# EAGLE board chunkycopter-v2 (EAGLE 9.6.2)
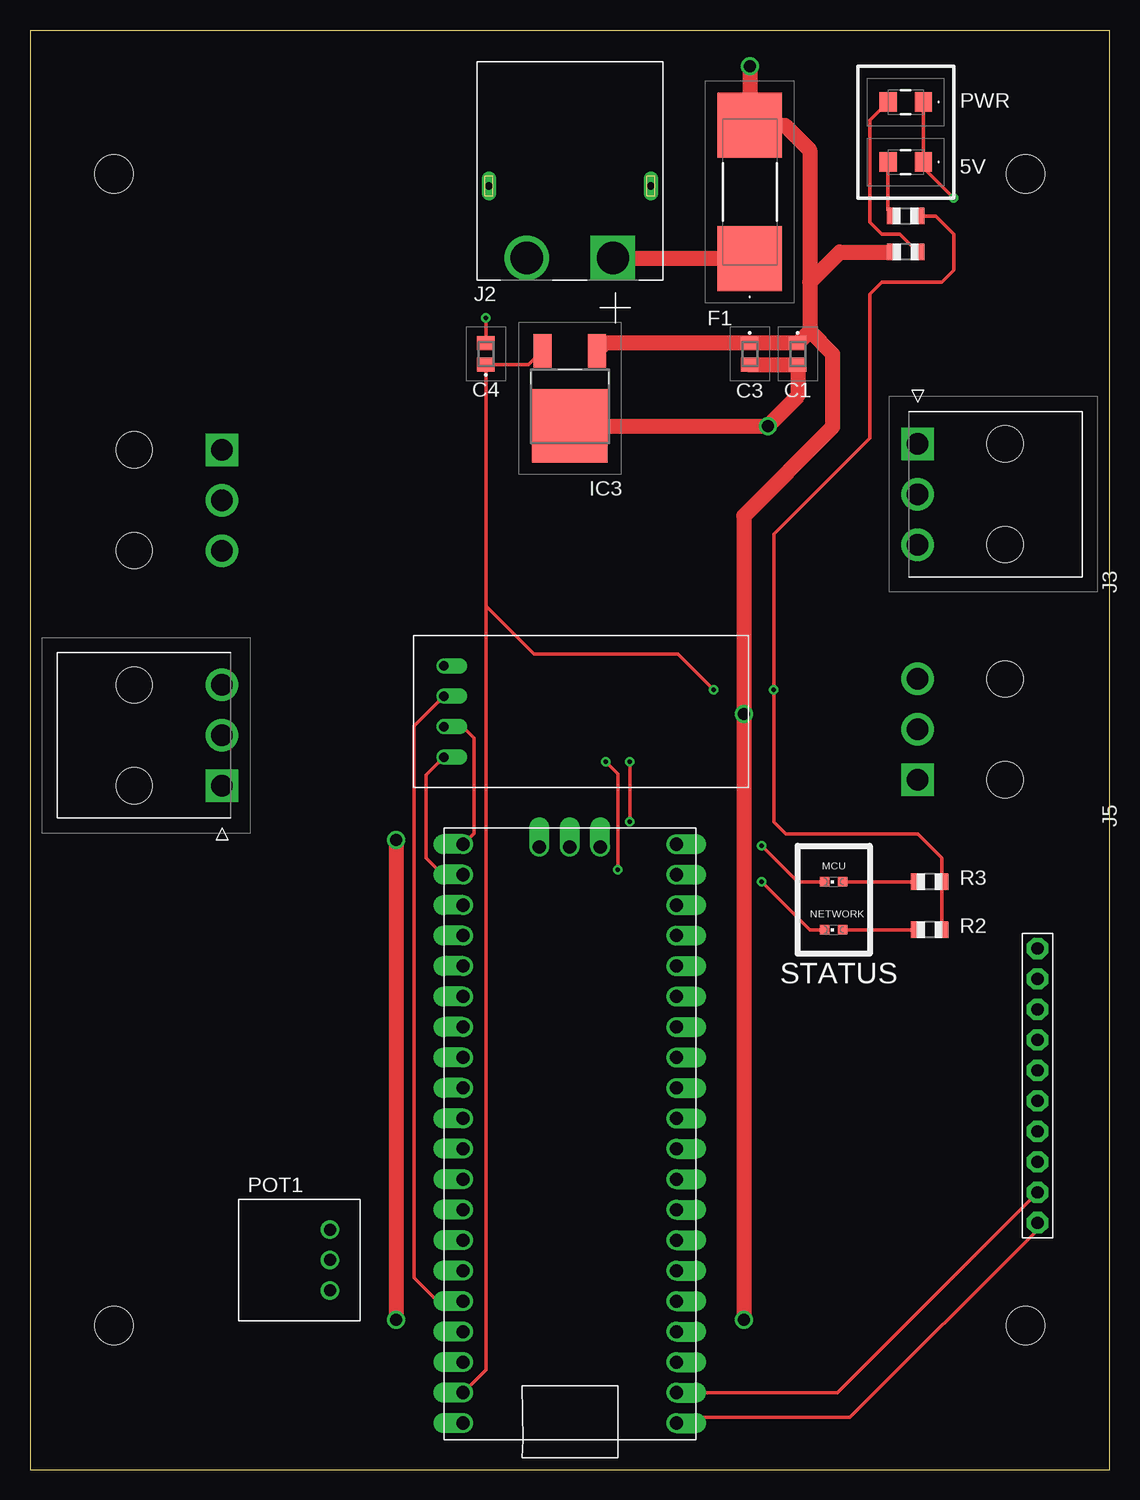
[diagram p0: board, top side]
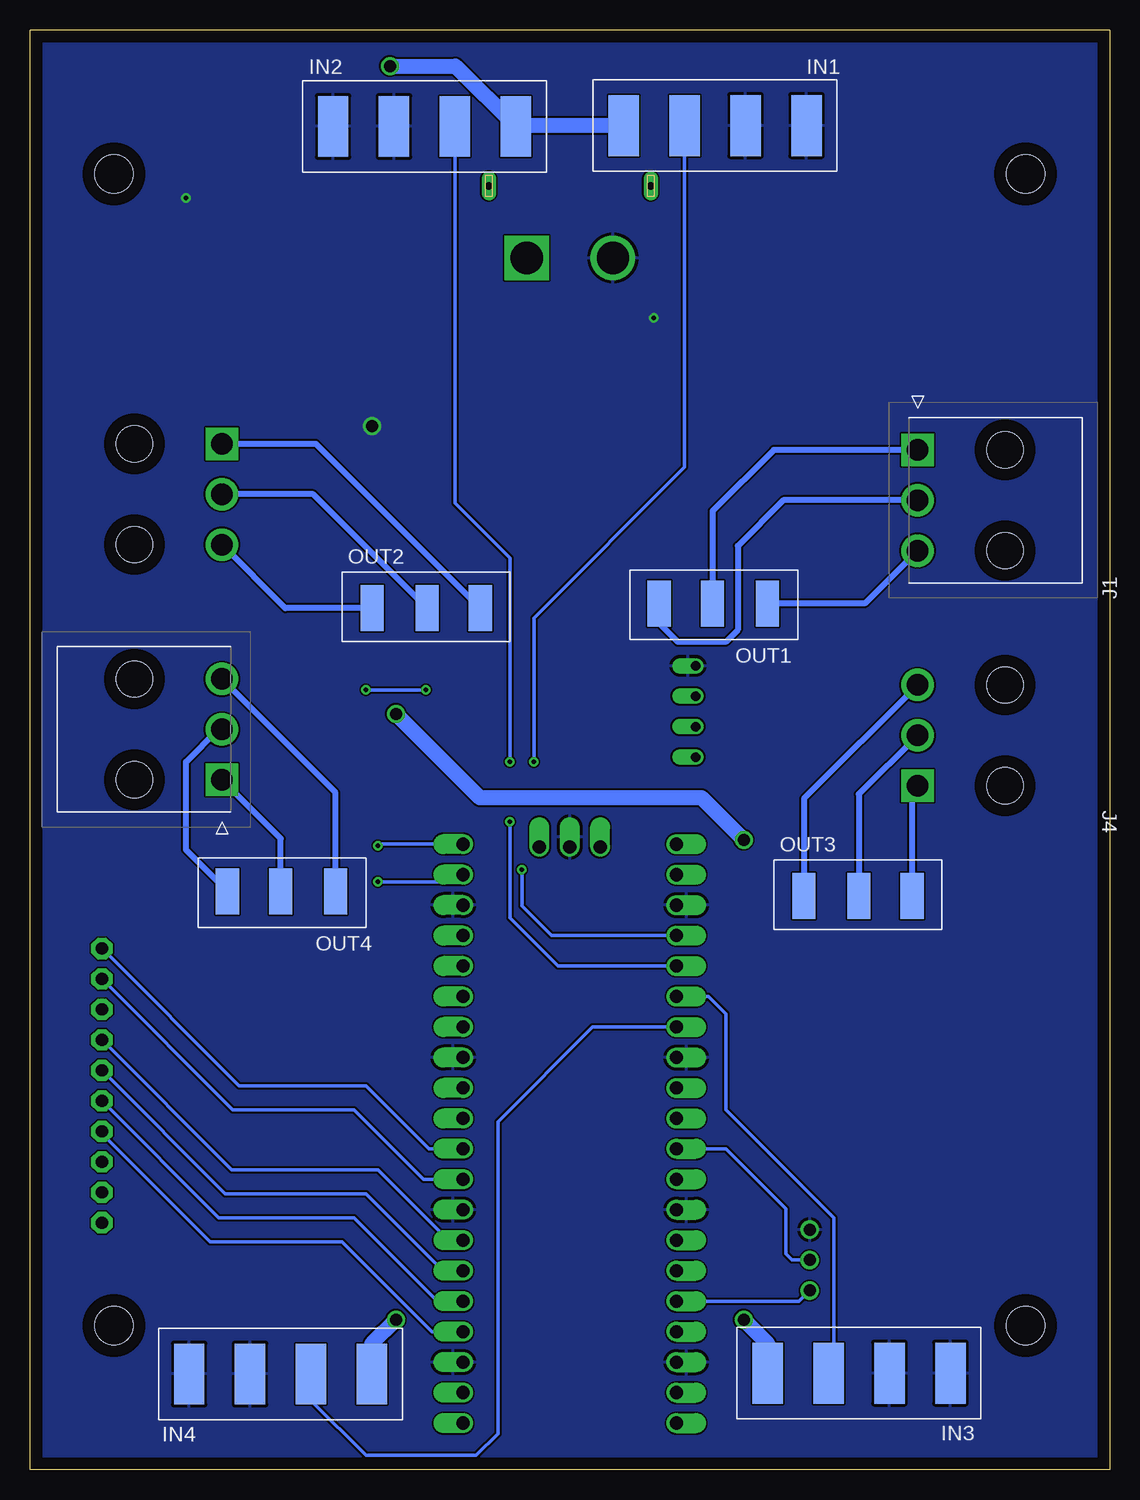
[diagram p1: board, bottom side, seen from below]

Size 90 x 120 mm. Coordinates in mm from the lower left corner, seen from the top.
Outline: 0,0 90,0 90,120 0,120 0,0
Copper layers (1*16): Top 0.035mm / dielectric 1.5mm / Bottom 0.035mm
Design rules "default": minimum track width 6mil, minimum drill 0.35mm, track to track 6mil, track to pad 6mil, pad to pad 6mil, via to via 6mil, smd to smd 6mil, copper to edge 40mil, drill to drill 6mil, minimum pad ring 10mil, minimum via ring 8mil, stop-mask expansion 4mil, vias tented up to drill 0mil, thermal gap 10mil
Holes 3.2 mm at 7,12 7,108 83,108 83,12

## Footprints (pad centres in the part's own frame; a part is rotated, then mirrored left to right if it is on the bottom)
C0805 = smd 1.15 x 1.45: 1 -0.9,0; 2 0.9,0
0456060DRSDE = smd 5.4 x 5.4: 1 -5.56,0; 2 5.56,0
L7805CDTTR = smd 1.5 x 2.8: 1 -2.286,-6.25; 3 2.286,-6.25 | smd 6.3 x 6.1: 2 0,0
ESC-INPUT = smd 5.08 x 2.54: A+ 2.54,11.43; A- 2.54,6.35; GND 2.54,1.27; VCC 2.54,16.51
39303037 = drill 1.8 pad 2.3 square: 1 0,0 | drill 1.8 pad 2.3: 2 -4.2,0; 3 -8.4,0 | hole 3: 0,-7.3; -8.4,-7.3
AMASS_XT60PW-M = drill 2.7 square: 1 3.6,-6 | drill 2.7: 2 -3.6,-6 | drill 0.6 pad 1.2 long: S1 6.75,0; S2 -6.75,0
SML012ENTT86 = smd 1.45 x 1.6: 1 -1.475,0; 2 1.475,0
CHIPLED_0603 = smd 0.8 x 0.8: A 0,-0.75; C 0,0.75
ESC-OUT = smd 1.93 x 3.81: 1 1.524,3.81; 2 6.096,3.81; 3 10.541,3.81
POT = drill 1: P_GND 0,0; P_VCC 0,5.08; P_VOUT 0,2.54
R0805 = smd 1.1 x 1.4: 1 -1,0; 2 1,0
RPI_PICO_TH = drill 1.1 pad 1.6 offset: 3V3 8.89,13.97; 3V3_EN 8.89,16.51; ADC_VREF 8.89,11.43; AGND 8.89,6.35; GND@1 -8.89,19.05; GND@2 -8.89,6.35; GND@3 -8.89,-6.35; GND@4 -8.89,-19.05; GND@5 0,-23.9; GND@6 8.89,-19.05; GND@7 8.89,-6.35; GND@8 8.89,19.05; GP0 -8.89,24.13; GP1 -8.89,21.59; GP2 -8.89,16.51; GP3 -8.89,13.97; GP4 -8.89,11.43; GP5 -8.89,8.89; GP6 -8.89,3.81; GP7 -8.89,1.27; GP8 -8.89,-1.27; GP9 -8.89,-3.81; GP10 -8.89,-8.89; GP11 -8.89,-11.43; GP12 -8.89,-13.97; GP13 -8.89,-16.51; GP14 -8.89,-21.59; GP15 -8.89,-24.13; GP16 8.89,-24.13; GP17 8.89,-21.59; GP18 8.89,-16.51; GP19 8.89,-13.97; GP20 8.89,-11.43; GP21 8.89,-8.89; GP22 8.89,-3.81; GP26_A0 8.89,1.27; GP27_A1 8.89,3.81; GP28_A2 8.89,8.89; RUN 8.89,-1.27; SWCLK -2.54,-23.9; SWDIO 2.54,-23.9; VBUS 8.89,24.13; VSYS 8.89,21.59
LSM9DS1_IMU = drill 0.8 offset: P$1 0,0; P$2 0,-2.54; P$3 0,-5.08; P$4 0,-7.62
1X10-BIG = drill 1.016 pad 1.778 octagon: 1 -11.43,0; 2 -8.89,0; 3 -6.35,0; 4 -3.81,0; 5 -1.27,0; 6 1.27,0; 7 3.81,0; 8 6.35,0; 9 8.89,0; 10 11.43,0

## Placement (x,y rotation side)
C1  0.1uF  [C0805]  64,93 270 top
C3  .33uF  [C0805]  60,93 270 top
C4  0.1uF  [C0805]  38,93 90 top
F1  250V 60A  [0456060DRSDE]  60,106.5 90 top
IC3  L7805CDT-TR  [L7805CDTTR]  45,87 180 top
IN1  ESC_IN  [ESC-INPUT]  24,109.5 90 bottom
IN2  ESC_IN  [ESC-INPUT]  66,114.5 270 bottom
IN3  ESC_IN  [ESC-INPUT]  12,5.5 90 bottom
IN4  ESC_IN  [ESC-INPUT]  78,10.5 270 bottom
J1  MOLEX-CONN-39-30-3037  [39303037]  16,85 90 bottom
J2  XT60PW-M  [AMASS_XT60PW-M]  45,107 0 top
J3  MOLEX-CONN-39-30-3037  [39303037]  74,85.5 90 top
J4  MOLEX-CONN-39-30-3037  [39303037]  16,57 270 top
J5  MOLEX-CONN-39-30-3037  [39303037]  74,57.5 270 bottom
LED1  GREEN  [SML012ENTT86]  73,114 180 top
LED2  GREEN  [CHIPLED_0603]  67,45 90 top
LED3  GREEN  [CHIPLED_0603]  67,49 90 top
LED4  GREEN  [SML012ENTT86]  73,109 180 top
OUT1  ESC-BLDC-CONNSMD  [ESC-OUT]  27,76 180 bottom
OUT2  ESC-BLDC-CONNSMD  [ESC-OUT]  63,68 0 bottom
OUT3  ESC-BLDC-CONNSMD  [ESC-OUT]  27,44 0 bottom
OUT4  ESC-BLDC-CONNSMD  [ESC-OUT]  63,52 180 bottom
POT1  POT-CONN  [POT]  25,20 180 top
R1  1k  [R0805]  73,101.5 180 top
R2  150  [R0805]  75,45 180 top
R3  150  [R0805]  75,49 180 top
R4  150  [R0805]  73,104.5 0 top
U$1  [RPI_PICO_TH]  45,28 180 top
U$2  LSM9DS1_IMU  [LSM9DS1_IMU]  34.5,67 0 top
U$3  [1X10-BIG]  84,32 270 top

## Library data of the parts
C1 C4 = C0805C104K5RACTU; DESCRIPTION: SMD Comm X7R, Ceramic, 0.1 uF, 10%, 50 VDC, 125 VDC, 125C, -55C, X7R, SMD, MLCC, Temperature Stable, Class II, 2.5 % , 5 GOhms, 11 mg, 0805, 2mm, 1.25mm, 0.78mm, 0.75mm, 0.5mm, 4000, 78 Weeks, 80; HEIGHT: 1.1mm; MANUFACTURER_NAME: KEMET; MANUFACTURER_PART_NUMBER: C0805C104K5RACTU; MOUSER_PART_NUMBER: 80-C0805C104K5R; MOUSER_PRICE-STOCK: https://www.mouser.co.uk/ProductDetail/KEMET/C0805C104K5RACTU?qs=Pc30aiB8zWUISNb2Qeyxfw%3D%3D
C3 = C0805C334K5RACTU; DESCRIPTION: SMD Comm X7R, Ceramic, 0.33 uF, 10%, 50 VDC, 125 VDC, 125C, -55C, X7R, SMD, MLCC, Temperature Stable, Class II, 2.5 % , 1.5152 GOhms, 13 mg, 0805, 2mm, 1.25mm, 0.9mm, 0.75mm, 0.5mm, 4000, 78 Weeks, 80; HEIGHT: 1.1mm; MANUFACTURER_NAME: KEMET; MANUFACTURER_PART_NUMBER: C0805C334K5RACTU; MOUSER_PART_NUMBER: 80-C0805C334K5R; MOUSER_PRICE-STOCK: https://www.mouser.co.uk/ProductDetail/KEMET/C0805C334K5RACTU?qs=nRD1PKnFC2Hh3tSy%2FGeH2Q%3D%3D
F1 = 0456060.DRSDE; DESCRIPTION: Surface Mount Fuses 60 AMP HIGH CURRENT SMD FUSE; HEIGHT: 4.5mm; MANUFACTURER_NAME: LITTELFUSE; MANUFACTURER_PART_NUMBER: 0456060.DRSDE; MOUSER_PART_NUMBER: 576-0456060.DRSDE; MOUSER_PRICE-STOCK: https://www.mouser.co.uk/ProductDetail/Littelfuse/0456060.DRSDE?qs=pUKx8fyJudDvlSmwSkC8QA%3D%3D
IC3 = L7805CDT-TR; DESCRIPTION: Linear Voltage Regulators 5.0V 1.0A Positive; HEIGHT: 2.63mm; MANUFACTURER_NAME: STMicroelectronics; MANUFACTURER_PART_NUMBER: L7805CDT-TR; MOUSER_PART_NUMBER: 511-L7805CDT-TR; MOUSER_PRICE-STOCK: https://www.mouser.co.uk/ProductDetail/STMicroelectronics/L7805CDT-TR?qs=gq%2F78KzUDX67VndS%2FbSB4Q%3D%3D
IN1-IN4 = ESC_IN
J1 J3-J5 = 39-30-3037; DESCRIPTION: Headers & Wire Housings 3 CKT R/A HEADER; HEIGHT: 7.2mm; MANUFACTURER_NAME: Molex; MANUFACTURER_PART_NUMBER: 39-30-3037; MOUSER_PART_NUMBER: 538-39-30-3037; MOUSER_PRICE-STOCK: https://www.mouser.co.uk/ProductDetail/Molex/39-30-3037?qs=404muyNbhLHF2IIVL5BKbQ%3D%3D
J2 = XT60PW-M; AVAILABILITY: Not in stock; DESCRIPTION: Socket, DC supply, male, PIN: 2; MF: AMASS; MP: XT60PW-M; PACKAGE: Package; PRICE: None
LED1 LED4 = SML012ENTT86; DESCRIPTION: Standard LEDs - SMD CHIP LED WITH REFLECTOR; HEIGHT: 1.5mm; MANUFACTURER_NAME: ROHM Semiconductor; MANUFACTURER_PART_NUMBER: SML012ENTT86; MOUSER_PART_NUMBER: 755-SML012ENTT86; MOUSER_PRICE-STOCK: https://www.mouser.co.uk/ProductDetail/ROHM-Semiconductor/SML012ENTT86?qs=tlsG%2FOw5FFictRsqziaydg%3D%3D
LED2 LED3 = led
OUT1-OUT4 = esc_bldc_connector
POT1 = POT_CONN
R1-R4 U$3 = adafruit
U$1 = RaspberryPi_Pico
U$2 = LSM9DS1_IMU

## Nets
3.3V: POT1.P_VCC U$1.3V3 U$2.P$2
5V: C4.1 IC3.3 R2.1 R3.1 R4.2 U$1.VSYS
GND: C1.2 C3.2 C4.2 IC3.2 IN1.A- IN1.GND IN2.A- IN2.GND IN3.A- IN3.GND IN4.A- IN4.GND J2.2 LED1.1 LED4.1 POT1.P_GND U$1.AGND U$1.GND@1 U$1.GND@2 U$1.GND@3 U$1.GND@4 U$1.GND@5 U$1.GND@6 U$1.GND@7 U$1.GND@8 U$2.P$1
IMU_SCL_17: U$1.GP17 U$2.P$4
IMU_SDA_16: U$1.GP16 U$2.P$3
MCU_INIT_OK: LED3.C U$1.GP15
MOT1: IN1.A+ U$1.GP18
MOT2: IN2.A+ U$1.GP19
MOT3: IN3.A+ U$1.GP20
MOT4: IN4.A+ U$1.GP21
N$1: LED1.2 R1.1
N$2: J1.3 OUT1.1
N$3: J1.2 OUT1.3
N$4: J1.1 OUT1.2
N$5: J3.3 OUT2.1
N$6: J3.2 OUT2.2
N$7: J3.1 OUT2.3
N$8: J4.3 OUT3.1
N$9: J5.3 OUT4.1
N$10: J4.1 OUT3.3
N$11: J5.1 OUT4.2
N$12: J5.2 OUT4.3
N$13: U$1.GP0 U$3.10
N$14: U$1.GP1 U$3.9
N$15: J4.2 OUT3.2
N$16: U$1.GP2 U$3.7
N$17: U$1.GP3 U$3.6
N$18: U$1.GP4 U$3.5
N$19: U$1.GP5 U$3.4
N$20: U$1.GP6 U$3.2
N$21: U$1.GP7 U$3.1
N$22: LED2.A R2.2
N$23: LED3.A R3.2
N$24: LED4.2 R4.1
NETWORK_OK: LED2.C U$1.GP14
POT: POT1.P_VOUT U$1.GP26_A0
VBATT: F1.1 J2.1
VCC: C1.1 C3.1 F1.2 IC3.1 IN1.VCC IN2.VCC IN3.VCC IN4.VCC R1.2

## Tracks (layer width: path | path; a pad name or v marks a point on that pad's centre or on a via)
3.3V
  Top 0.305: U$1.3V3 33.97,14.03 32,16 32,61.96 U$2.P$2
  Bottom 0.305: POT1.P_VCC 25.89,14.03 U$1.3V3
5V  (via drill 0.35)
  Top 0.305: 38,72 C4.1 41.56,92.1 IC3.3 | U$1.VSYS 38,8.3 38,72 | R2.1 R3.1 76,51 74,53 63,53 62,54 v62,65 62,78 70,86 70,98 71,99 76,99 77,100 77,103 75.5,104.5 R4.2 | v57,65 54,68 42,68 38,72
  Bottom 0.305: v57,65 v62,65
GND  (via drill 0.35, 1)
  Top 0.305: v38,96 C4.2 | v77,106 74.47,108.53 LED4.1 LED1.1
  Top 1.27: IC3.2 v61.5,87 64,89.5 C1.2 C3.2
  pour Bottom: -1,121 91,121 91,-1 -1,-1
IMU_SCL_17
  Top 0.305: U$2.P$4 33,57.88 33,51 34.41,49.59 U$1.GP17
IMU_SDA_16
  Top 0.305: U$2.P$3 36.08,61.92 37,61 37,53.02 U$1.GP16
MCU_INIT_OK  (via drill 0.35)
  Top 0.305: LED3.C 64,49 v61,52
  Bottom 0.305: U$1.GP15 60.87,52.13 v61,52
MOT1  (via drill 0.35)
  Top 0.305: v48,59 49,58 v49,50
  Bottom 0.305: IN1.A+ 35.43,84 35.43,83.57 48,71 v48,59 | v49,50 49,47 46.51,44.51 U$1.GP18
MOT2  (via drill 0.35)
  Top 0.305: v50,54 v50,59
  Bottom 0.305: IN2.A+ 54.57,80.57 50,76 v50,59 | U$1.GP19 36.14,42 46,42 50,46 v50,54
MOT3
  Bottom 0.305: U$1.GP20 33.43,39.43 32,38 32,30 23,21 23,8.47 IN3.A+
MOT4
  Bottom 0.305: U$1.GP21 43.11,36.89 51,29 51,3 52.83,1.17 62,1.17 66.57,5.74 IN4.A+
N$1
  Top 0.305: R1.1 72.5,103 71,103 70,104 70,112.47 LED1.2
N$2
  Bottom 0.508: J1.3 20.41,72.19 OUT1.1
N$3
  Bottom 0.508: J1.2 27.2,80.8 31,77 31,70 32,69 36,69 37.54,70.54 OUT1.3
N$4
  Bottom 0.508: J1.1 28,85 33.1,79.9 OUT1.2
N$5
  Bottom 0.508: OUT2.1 68.71,71.81 J3.3
N$6
  Bottom 0.508: OUT2.2 66.39,81.3 J3.2
N$7
  Bottom 0.508: OUT2.3 66.15,85.5 J3.1
N$8
  Bottom 0.508: J4.3 25.48,55.92 OUT3.1
N$9
  Bottom 0.508: OUT4.1 64.52,56.42 J5.3
N$10
  Bottom 0.508: J4.1 16.46,56.54 OUT3.3
N$11
  Bottom 0.508: OUT4.2 69.1,52.6 J5.1
N$12
  Bottom 0.508: OUT4.3 77,51.65 77,59 74.3,61.7 J5.2
N$13
  Top 0.305: U$1.GP0 54.39,4.37 68.37,4.37 84,20 U$3.10
N$14
  Top 0.305: U$1.GP1 67.3,6.41 U$3.9
N$15
  Bottom 0.508: J4.2 20.9,56.3 OUT3.2
N$16
  Bottom 0.305: U$1.GP2 56.49,11.49 64,19 75,19 84,28 U$3.7
N$17
  Bottom 0.305: U$1.GP3 55.97,14.03 56,14 63,21 74.27,21 U$3.6
N$18
  Bottom 0.305: U$1.GP4 55.57,16.57 62,23 73.73,23 U$3.5
N$19
  Bottom 0.305: U$1.GP5 55.11,19.11 61,25 73.19,25 U$3.4
N$20
  Bottom 0.305: U$1.GP6 57.19,24.19 63,30 73.11,30 U$3.2
N$21
  Bottom 0.305: U$1.GP7 56.73,26.73 62,32 72.57,32 U$3.1
N$22
  Top 0.305: LED2.A R2.2
N$23
  Top 0.305: LED3.A R3.2
N$24
  Top 0.305: LED4.2 71.53,104.97 R4.1
NETWORK_OK  (via drill 0.35)
  Top 0.305: LED2.C 65,45 v61,49
  Bottom 0.305: U$1.GP14 54.48,49 v61,49
POT
  Bottom 0.305: U$1.GP26_A0 32,26.73 27,21.73 27,18 26.46,17.46 POT1.P_VOUT
VBATT
  Top 1.27: F1.1 59.94,101 J2.1
VCC  (via drill 1)
  Top 1.27: v59.5,12.5 v59.5,63 59.5,79.5 66.9,86.9 66.9,93 65,94.9 | v60,117 F1.2 62.94,112.06 65,110 65,99 | v30.5,52.5 v30.5,12.5 | IC3.1 47.94,93.9 C3.1 C1.1 65,94.9 | 65,99 65,94.9 | 65,99 67.5,101.5 R1.2
  Bottom 1.27: v59.5,63 52.5,56 34,56 v30.5,52.5 | v60,117 54.53,117 IN2.VCC 49.41,112.04 IN1.VCC | v30.5,12.5 28.51,10.51 IN3.VCC | v59.5,12.5 61.49,10.51 IN4.VCC

## Text on the board
tNames: PWR | 5V | MCU | NETWORK | STATUS